# EAGLE board atmega328 (EAGLE 9.6.2)
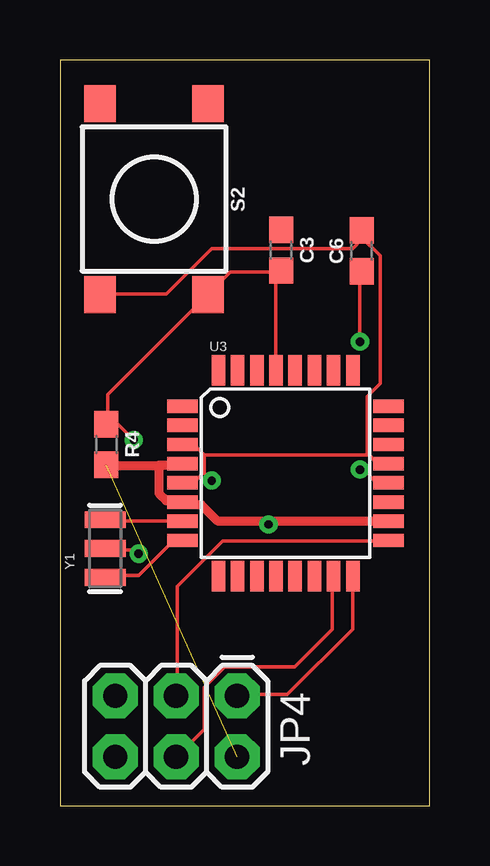
[diagram p0: board, top side]
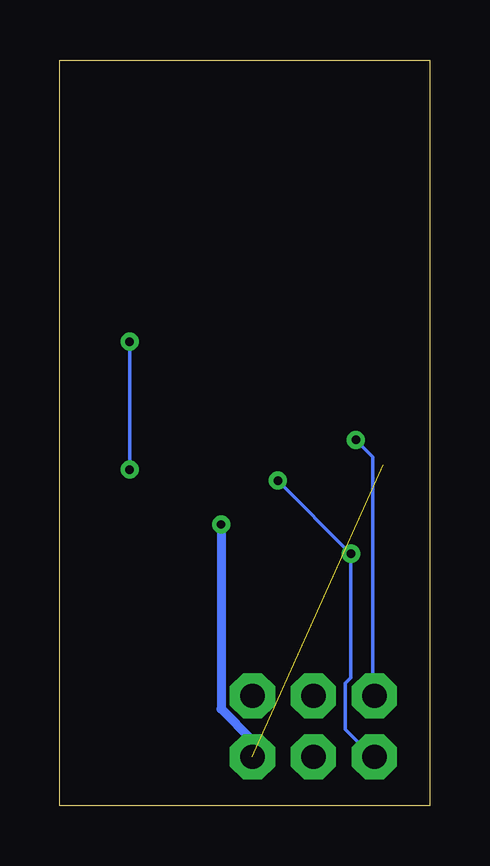
[diagram p1: board, bottom side, seen from below]

Size 15.4 x 31.1 mm. Coordinates in mm from the lower left corner, seen from the top.
Outline: 0,0 15.4,0 15.4,31.1 0,31.1 0,0
Copper layers (1*16): Top 0.035mm / dielectric 1.5mm / Bottom 0.035mm
Design rules "default": minimum track width 6mil, minimum drill 0.35mm, track to track 6mil, track to pad 6mil, pad to pad 6mil, via to via 6mil, smd to smd 6mil, copper to edge 40mil, drill to drill 6mil, minimum pad ring 10mil, minimum via ring 8mil, stop-mask expansion 4mil, vias tented up to drill 0mil, thermal gap 10mil
Net classes: 1 VCC: width 0.381 mm

## Footprints (pad centres in the part's own frame; a part is rotated, then mirrored left to right if it is on the bottom)
0603 = smd 1.1 x 1: 1 -0.85,0; 2 0.85,0
2X3 = drill 1.016 pad 1.88 octagon: 1 0,0; 2 0,2.54; 3 2.54,0; 4 2.54,2.54; 5 5.08,0; 6 5.08,2.54
TACTILE_SWITCH_SMD_6.2MM_TALL = smd 1.55 x 1.3: A1 -3.975,-2.25; A2 3.975,-2.25; B1 -3.975,2.25; B2 3.975,2.25
TQFP32-08 = smd 1.27 x 0.559: 1 -4.293,2.8; 2 -4.293,2; 3 -4.293,1.2; 4 -4.293,0.4; 5 -4.293,-0.4; 6 -4.293,-1.2; 7 -4.293,-2; 8 -4.293,-2.8; 17 4.293,-2.8; 18 4.293,-2; 19 4.293,-1.2; 20 4.293,-0.4; 21 4.293,0.4; 22 4.293,1.2; 23 4.293,2; 24 4.293,2.8 | smd 0.559 x 1.27: 9 -2.8,-4.293; 10 -2,-4.293; 11 -1.2,-4.293; 12 -0.4,-4.293; 13 0.4,-4.293; 14 1.2,-4.293; 15 2,-4.293; 16 2.8,-4.293; 25 2.8,4.293; 26 2,4.293; 27 1.2,4.293; 28 0.4,4.293; 29 -0.4,4.293; 30 -1.2,4.293; 31 -2,4.293; 32 -2.8,4.293
RESONATOR-SMD = smd 0.7 x 1.7: 1 -1.2,0; 2 0,0; 3 1.2,0

## Placement (x,y rotation side)
C3  0.1uF  [0603]  9.21,23.17 270 top
C6  0.1uF  [0603]  12.57,23.14 90 top
JP4  AVR_SPI  [2X3]  7.38,4.59 180 top
R4  10k  [0603]  1.93,15.07 270 top
S2  MOMENTARY-SWITCH-SPST-SMD-6.2MM-TALL  [TACTILE_SWITCH_SMD_6.2MM_TALL]  3.92,25.3 270 top
U3  ATMEGA328  [TQFP32-08]  9.4,13.87 0 top
Y1  8MHz  [RESONATOR-SMD]  1.88,10.73 90 top

## Library data of the parts
C3 C6 = SparkFun-Capacitors; PROD_ID: CAP-08604
JP4 U3 Y1 = SparkFun
R4 = SparkFun-Resistors; PROD_ID: RES-00824
S2 = SparkFun-Switches; PROD_ID: SWCH-11966; SF_SKU: COM-12992

## Nets
#ADC-0!: U3.23
#ADC-1!: U3.24
#ADC-2!: U3.25
#ADC-3!: U3.26
#ADC-6!: U3.19
#ADC-7!: U3.22
#AIN-0!||#GPIO-6!: U3.10
#AIN-1!||#GPIO-7!: U3.11
#GPIO-2!: U3.32
#GPIO-3!: U3.1
#GPIO-4!: U3.2
#GPIO-5!: U3.9
#GPIO-8!: U3.12
#GPIO-9!: U3.13
#GPIO-10!: U3.14
#GPIO-DTR!: C3.1
#GPIO-RESET!: C3.2 JP4.5 R4.1 S2.B2 U3.29
#I2C-0.SCL!||#ADC-5!: U3.28
#I2C-0.SDA!||#ADC-4!: U3.27
#SERIAL-0.RX!||#GPIO-0!: U3.30
#SERIAL-0.TX!||#GPIO-1!: U3.31
#SPI-0.MISO!||#GPIO-12!: JP4.1 U3.16
#SPI-0.MOSI!||#GPIO-11!: JP4.4 U3.15
#SPI-0.SCK!||#GPIO-13!: JP4.3 U3.17
@VIN_3.3V-5V: JP4.2 R4.2
AREF: C6.1 U3.20
GND: C6.2 JP4.6 S2.A2 U3.3 U3.5 U3.21 Y1.2
N$10: U3.7 Y1.3
N$12: U3.8 Y1.1
VCC [VCC]: U3.4 U3.6 U3.18

## Tracks (layer width: path | path; a pad name or v marks a point on that pad's centre or on a via)
#GPIO-RESET!  (via drill 0.35)
  Top 0.152: 8.99,22.25 7.09,22.25 6.17,21.34 S2.B2 6.1,21.26 1.98,17.14 1.98,15.93 R4.1 2.41,15.92 v3.07,15.26 | 8.99,22.25 9.14,22.25 C3.2 8.99,22.25 | 8.99,22.25 8.99,18.21 U3.29
  Bottom 0.152: v3.07,15.26 2.36,14.55 2.36,4.65 JP4.5
#SPI-0.MISO!||#GPIO-12!
  Top 0.152: U3.16 12.19,9.53 12.19,7.37 9.47,4.65 7.39,4.65 JP4.1
#SPI-0.MOSI!||#GPIO-11!
  Top 0.152: U3.15 11.35,9.53 11.35,7.37 9.78,5.79 6.86,5.79 6.02,4.95 6.02,3.2 4.88,2.06 JP4.4
#SPI-0.SCK!||#GPIO-13!
  Top 0.152: U3.17 13.64,11.05 6.78,11.05 4.88,9.14 4.88,4.65 JP4.3
@VIN_3.3V-5V  (1 unrouted)
AREF  (via drill 0.35)
  Top 0.152: v12.5,19.36 12.5,22.25 C6.1 | v12.5,14.02 12.65,14.02 13.18,13.49 13.64,13.49 U3.20
  Bottom 0.152: v12.5,14.02 v12.5,19.36
GND  (via drill 0.35)
  Top 0.152: v3.28,10.52 3.12,10.67 1.91,10.67 Y1.2 | 5.98,13.91 6.02,13.95 6.02,14.63 | 5.98,13.91 5.56,13.49 5.18,13.49 U3.5 | 6.02,14.63 5.64,15.01 5.18,15.01 U3.3 | 12.84,14.67 13.18,14.33 13.64,14.33 U3.21 | 12.84,14.67 12.8,14.71 12.8,17.07 13.34,17.6 13.34,22.94 12.57,23.7 12.57,23.93 C6.2 12.57,23.62 12.19,23.24 6.33,23.24 4.42,21.34 1.68,21.34 S2.A2 | 6.02,14.63 12.8,14.63 12.84,14.67 | 5.98,13.91 v6.33,13.56
  Bottom 0.152: JP4.6 2.36,2.06 3.5,3.2 3.5,5.11 3.28,5.33 v3.28,10.52 v6.33,13.56
N$10
  Top 0.152: U3.7 5.11,11.89 1.91,11.89 Y1.3
N$12
  Top 0.152: U3.8 5.11,11.05 4.72,11.05 3.28,9.6 1.91,9.6 Y1.1
VCC  (via drill 0.35)
  Top 0.381: 4.12,14.17 1.98,14.17 | U3.4 5.11,14.25 5.05,14.2 4.12,14.2 4.12,14.17 | 4.12,14.17 4.12,14.1 4.12,13.03 4.42,12.72 5.11,12.72 U3.6 5.26,12.57 5.87,12.57 6.55,11.89 8.69,11.89 | 8.69,11.89 13.64,11.89 U3.18 | v8.69,11.73 8.69,11.89
  Bottom 0.381: 7.39,2.06 7.39,2.74 8.69,4.04 v8.69,11.73